# Altium PCB PCB_Keypad_Rev3_2025-01-16.pcbdoc
Units mm, origin at the board's own origin, x right, y up, seen from the top; angles counter-clockwise.
Board outline 82.58 x 103.2 mm, 2 copper layers (Top Layer, Bottom Layer); 55 components, 70 nets, 237 pads, 37 vias.
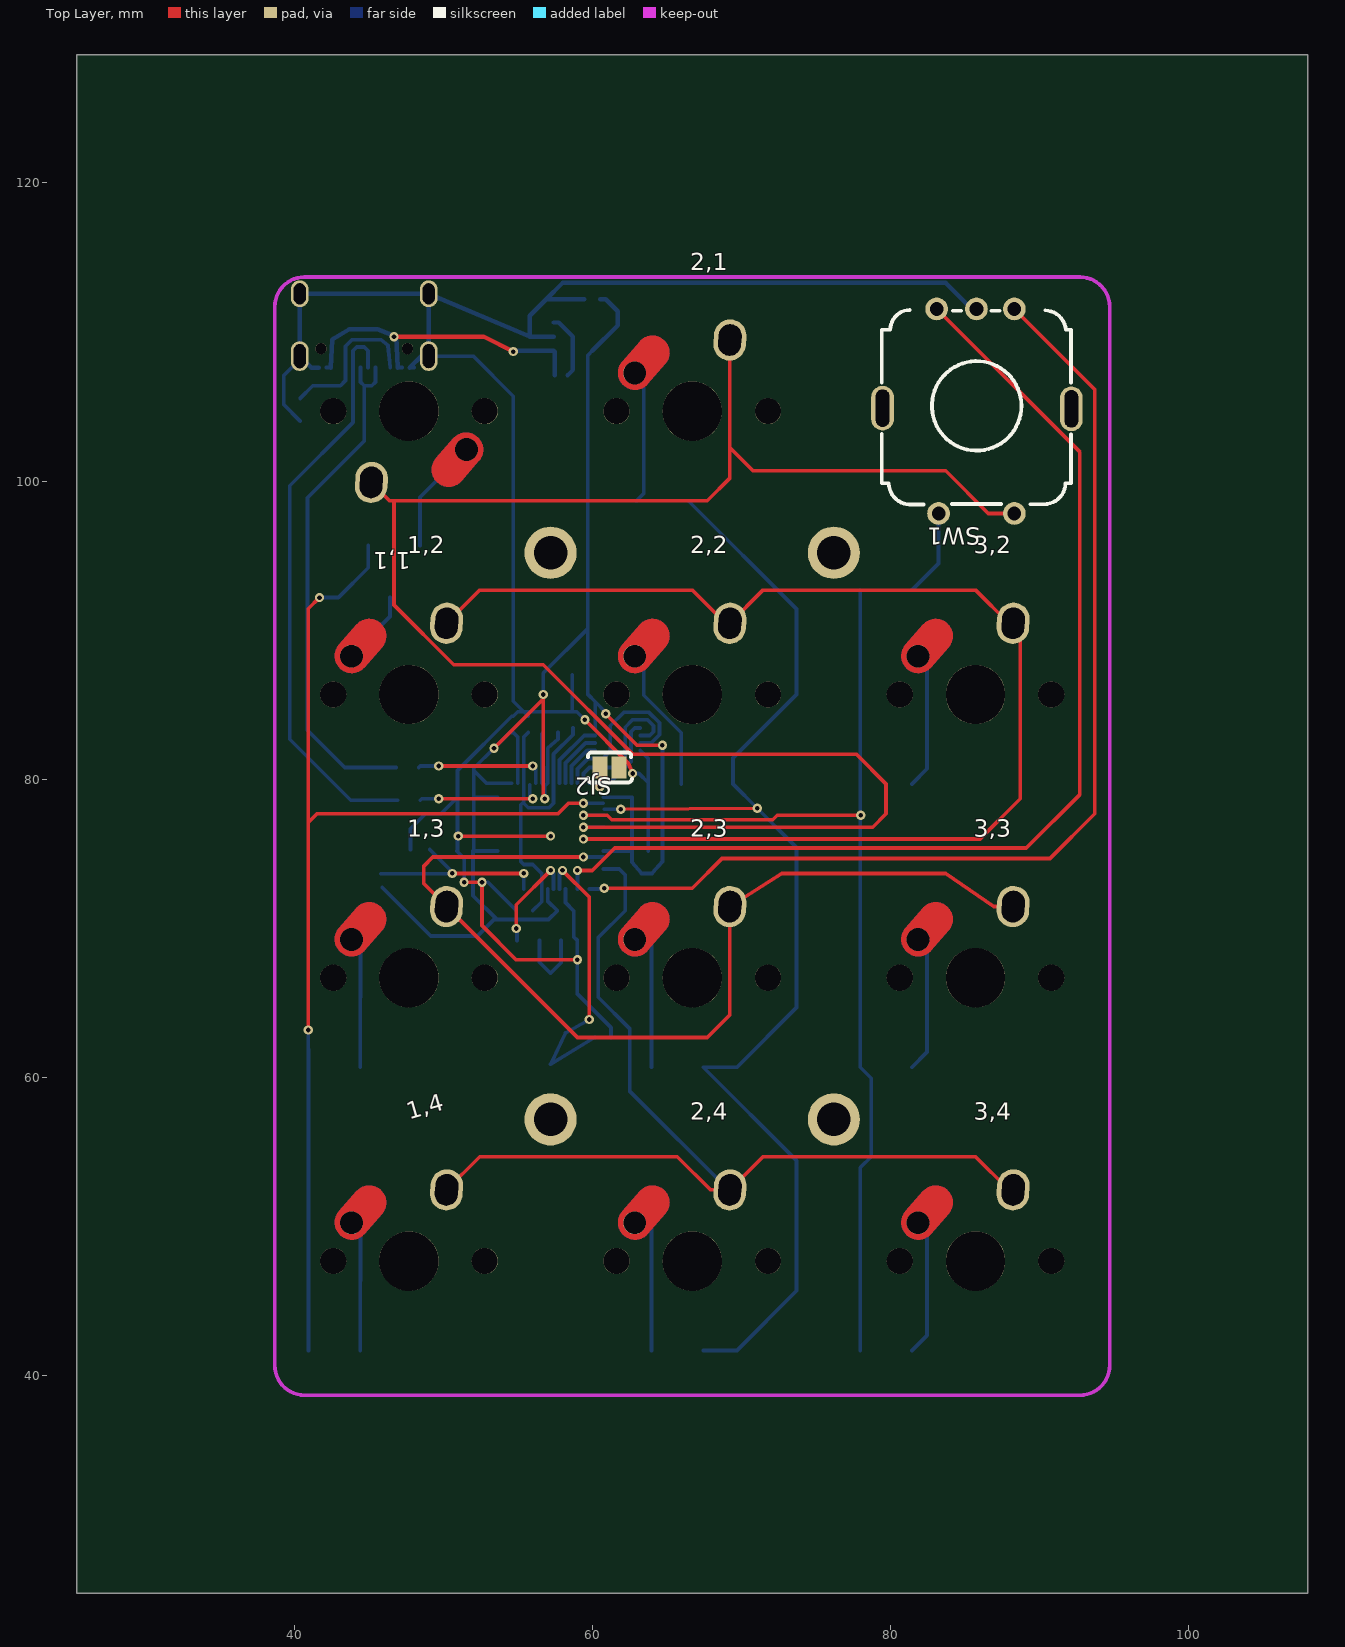
[diagram p0: Top Layer view]
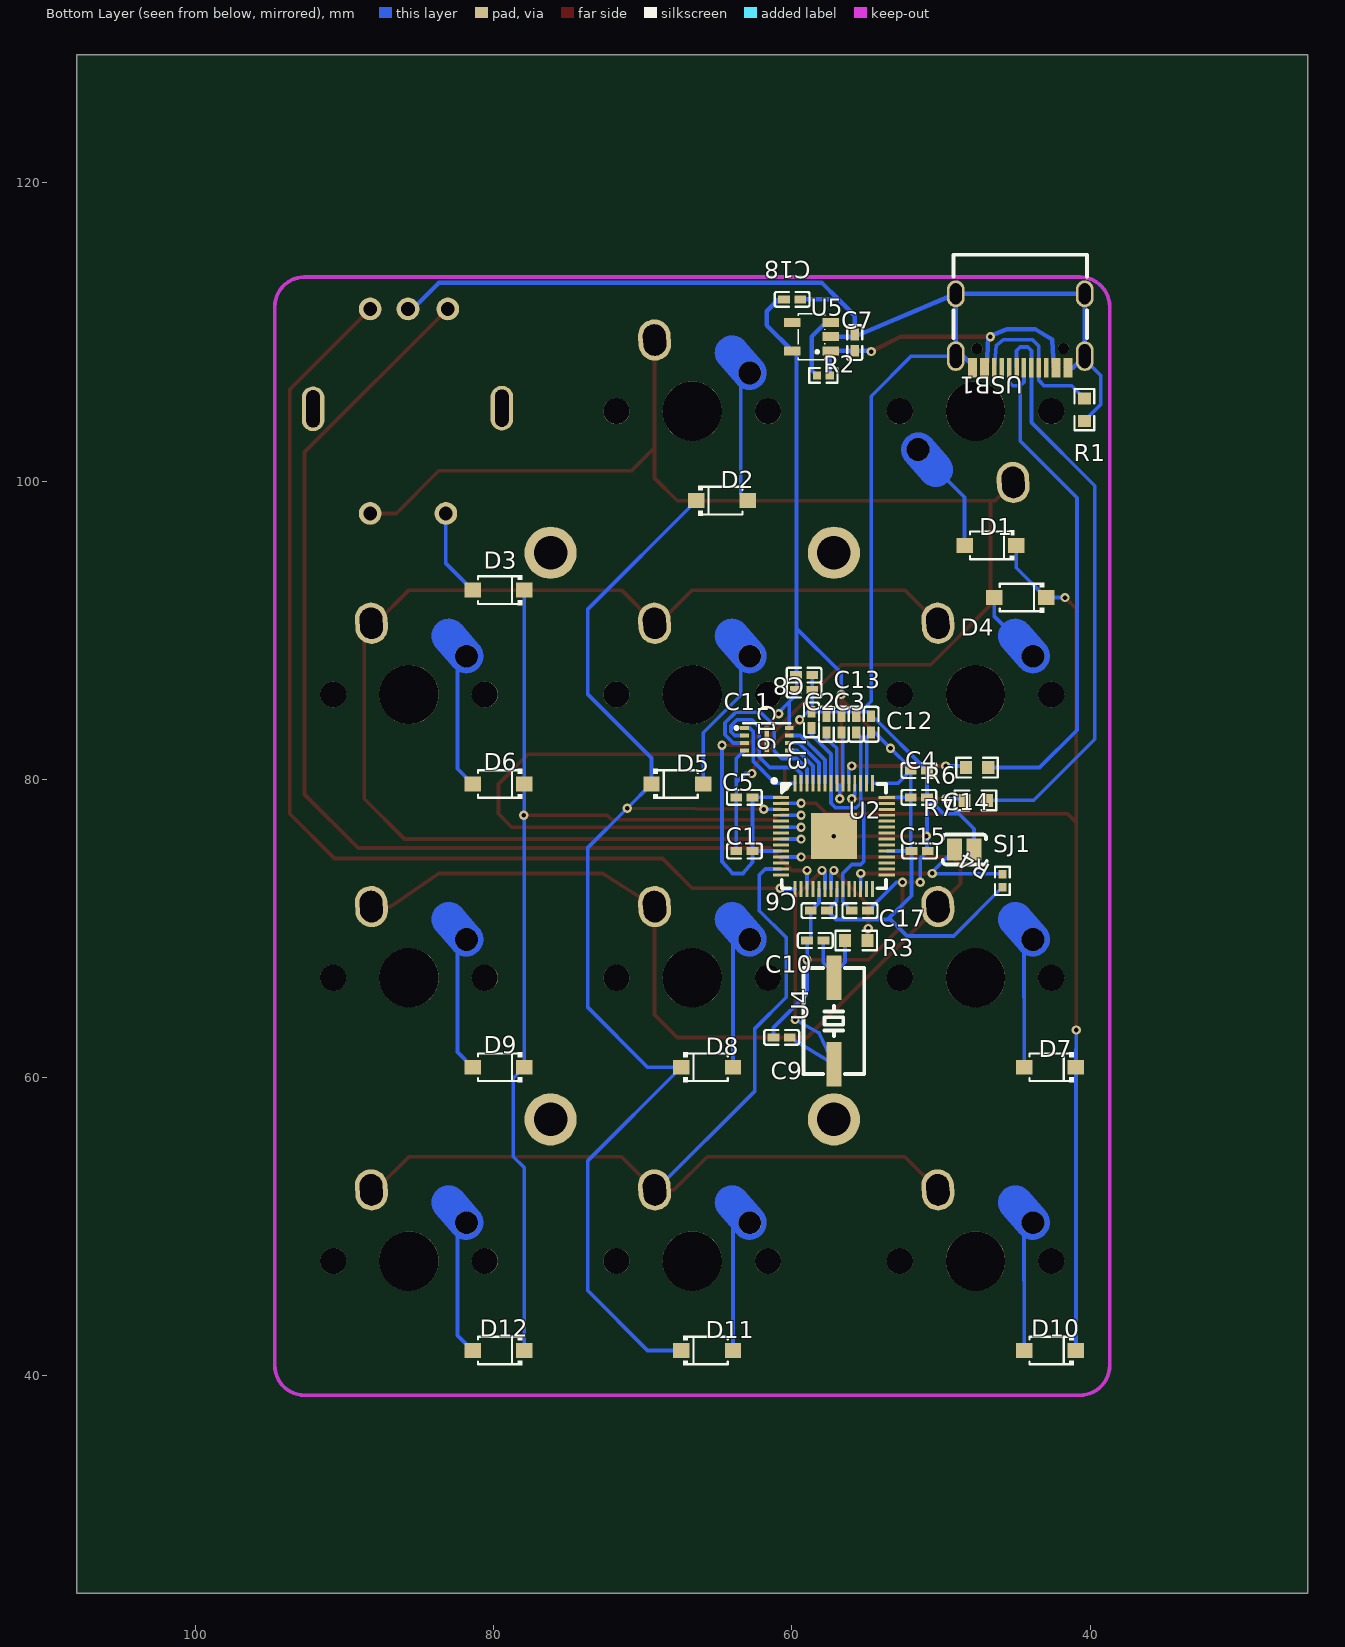
[diagram p1: Bottom Layer view, seen from below]

## Layer stack, top to bottom
Top Layer: signal copper (thickness not stored)
Dielectric: dielectric 0.32, FR-4, Dk 4.8
Bottom Layer: signal copper (thickness not stored)

## Board outline
107.977,25.4 25.4,25.4 25.4,128.603 107.977,128.603

## Components (designator, comment, footprint, x,y, rotation, side; value= is the part's Value field where it differs from the comment)
1,1 "MX_ALPS-1U-NOLED" MX_ALPS-1U-NOLED 47.688,104.688 r180 top
1,2 "MX_ALPS-1U-NOLED" MX_ALPS-1U-NOLED 47.688,85.688 r0 top
1,3 "MX_ALPS-1U-NOLED" MX_ALPS-1U-NOLED 47.688,66.688 r0 top
1,4 "MX_ALPS-1U-NOLED" MX_ALPS-1U-NOLED 47.688,47.688 r0 top
2,1 "MX_ALPS-1U-NOLED" MX_ALPS-1U-NOLED 66.688,104.688 r0 top
2,2 "MX_ALPS-1U-NOLED" MX_ALPS-1U-NOLED 66.688,85.688 r0 top
2,3 "MX_ALPS-1U-NOLED" MX_ALPS-1U-NOLED 66.688,66.688 r0 top
2,4 "MX_ALPS-1U-NOLED" MX_ALPS-1U-NOLED 66.688,47.688 r0 top
3,2 "MX_ALPS-1U-NOLED" MX_ALPS-1U-NOLED 85.688,85.688 r0 top
3,3 "MX_ALPS-1U-NOLED" MX_ALPS-1U-NOLED 85.688,66.688 r0 top
3,4 "MX_ALPS-1U-NOLED" MX_ALPS-1U-NOLED 85.688,47.688 r0 top
C1 "100nF" C0402 63.188,75.188 r0 bottom
C2 "100nF" C0402 57.688,83.688 r90 bottom
C3 "100nF" C0402 56.688,83.688 r90 bottom
C4 "100nF" C0402 51.488,80.588 r180 bottom
C5 "100nF" C0402 63.188,78.788 r0 bottom
C6 "100nF" C0402 58.188,71.188 r0 bottom
C7 "1uF" C0402 55.788,109.288 r90 bottom
C8 "100nF" C0402 59.188,86.988 r180 bottom
C9 "22pF" C0402 60.688,62.688 r0 bottom
C10 "22pF" C0402 58.438,69.188 r0 bottom
C11 "2.2uF" C0402 59.188,85.988 r0 bottom
C12 "1uF" C0402 54.688,83.688 r270 bottom
C13 "1uF" C0402 55.688,83.688 r270 bottom
C14 "100nF" C0402 51.488,78.788 r180 bottom
C15 "100nF" C0402 51.439,75.188 r180 bottom
C16 "100nF" C0402 58.688,83.988 r90 bottom
C17 "100nF" C0402 55.438,71.188 r180 bottom
C18 "1uF" C0402 59.988,112.188 r180 bottom
D1 "1N4148W_C81598" SOD-123F_L2.7-W1.6-LS3.8-RD 46.689,95.688 r180 bottom
D2 "1N4148W_C81598" SOD-123F_L2.7-W1.6-LS3.8-RD 64.688,98.688 r0 bottom
D3 "1N4148W_C81598" SOD-123F_L2.7-W1.6-LS3.8-RD 79.688,92.688 r180 bottom
D4 "1N4148W_C81598" SOD-123F_L2.7-W1.6-LS3.8-RD 44.689,92.188 r180 bottom
D5 "1N4148W_C81598" SOD-123F_L2.7-W1.6-LS3.8-RD 67.688,79.688 r0 bottom
D6 "1N4148W_C81598" SOD-123F_L2.7-W1.6-LS3.8-RD 79.688,79.688 r180 bottom
D7 "1N4148W_C81598" SOD-123F_L2.7-W1.6-LS3.8-RD 42.689,60.688 r180 bottom
D8 "1N4148W_C81598" SOD-123F_L2.7-W1.6-LS3.8-RD 65.688,60.688 r0 bottom
D9 "1N4148W_C81598" SOD-123F_L2.7-W1.6-LS3.8-RD 79.688,60.688 r180 bottom
D10 "1N4148W_C81598" SOD-123F_L2.7-W1.6-LS3.8-RD 42.689,41.689 r180 bottom
D11 "1N4148W_C81598" SOD-123F_L2.7-W1.6-LS3.8-RD 65.688,41.689 r0 bottom
D12 "1N4148W_C81598" SOD-123F_L2.7-W1.6-LS3.8-RD 79.688,41.689 r180 bottom
R1 "5.1k" R0603 40.389,104.788 r90 bottom
R2 "10kΩ" R0402 57.888,107.088 r0 bottom
R3 "1kΩ" R0603 55.688,69.188 r180 bottom
R4 "10kΩ" R0402 45.889,73.188 r270 bottom
R6 "27Ω" R0603 47.589,80.788 r0 bottom
R7 "27Ω" R0603 47.688,78.588 r180 bottom
SJ1 "JUMPER-PAD-2" PAD-JUMPER-2#1 47.788,75.288 r180 bottom
SJ2 "JUMPER-PAD-2" PAD-JUMPER-2#2 61.788,80.788 r180 top
SW1 "Rotary Encoder" ROTARYENCODER 85.688,104.688 r180 top
U2 "RP2040" LQFN-56_L7.0-W7.0-P0.4-EP 57.188,76.188 r0 bottom
U3 "W25Q16JVUXIQ" USON-8_L3.0-W2.0-P0.50-BL-EP 61.688,82.688 r90 bottom
U4 "12MHz" HC-49S_L7.0-W4.0 57.188,63.788 r270 bottom
U5 "TPTLV70233DBVR" SOT-23-5_L3.0-W1.7-P0.95-LS2.8-BR 58.688,109.688 r0 bottom
USB1 "USB-TYPE-C-018" USB-C_SMD-TYPE-C-31-M-12 44.689,110.088 r180 bottom

## Footprints (in the part's own frame and the unit in brackets; to place one, negate y for a bottom-side part, rotate by r counter-clockwise, add the part's x,y. Pads: shape width x height; smd on the part's side, far side on the other; paste and mask are expansions set on the pad)
C0402 [mm]
  rect 0.79x0.54 smd paste-100 mask+0.051: 1(0.545,0) 2(-0.545,0)
  silkscreen extent -1.17,-0.5 1.17,0.5
HC-49S_L7.0-W4.0 [mm]
  rect 3x1 smd paste+0 mask+0.051: 1(2.9,0) 2(-2.9,0)
  silkscreen extent -3.56,-2.03 3.56,2.03
LQFN-56_L7.0-W7.0-P0.4-EP [mm]
  rect 1.1x0.2 smd paste-100 mask+0.05: 1(3.55,-2.6) 2(3.55,-2.2) 3(3.55,-1.8) 4(3.55,-1.4) 5(3.55,-1) 6(3.55,-0.6) 7(3.55,-0.2) 8(3.55,0.2) 9(3.55,0.6) 10(3.55,1) 11(3.55,1.4) 12(3.55,1.8) 13(3.55,2.2) 14(3.55,2.6) 29(-3.55,2.6) 30(-3.55,2.2) 31(-3.55,1.8) 32(-3.55,1.4) 33(-3.55,1) 34(-3.55,0.6) 35(-3.55,0.2) 36(-3.55,-0.2) 37(-3.55,-0.6) 38(-3.55,-1) 39(-3.55,-1.4) 40(-3.55,-1.8) 41(-3.55,-2.2) 42(-3.55,-2.6)
  rect 0.2x1.1 smd paste-100 mask+0.05: 15(2.6,3.55) 16(2.2,3.55) 17(1.8,3.55) 18(1.4,3.55) 19(1,3.55) 20(0.6,3.55) 21(0.2,3.55) 22(-0.2,3.55) 23(-0.6,3.55) 24(-1,3.55) 25(-1.4,3.55) 26(-1.8,3.55) 27(-2.2,3.55) 28(-2.6,3.55) 43(-2.6,-3.55) 44(-2.2,-3.55) 45(-1.8,-3.55) 46(-1.4,-3.55) 47(-1,-3.55) 48(-0.6,-3.55) 49(-0.2,-3.55) 50(0.2,-3.55) 51(0.6,-3.55) 52(1,-3.55) 53(1.4,-3.55) 54(1.8,-3.55) 55(2.2,-3.55) 56(2.6,-3.55)
  rect 3.1x3.1 smd paste-100 mask+0.05: 57(0,0)
  silkscreen extent -3.5,-3.83 4.13,3.5
MX_ALPS-1U-NOLED [mil]
  round 60 hole 60 paste+0: 1(-152,101)
  oval 108.9x86 hole 60 slot 82.9 at 86 deg rot 86 paste+0 mask+4: 2(99.4,188)
  round 68.9 hole 68.9 unplated paste+0: ""(-200,0) ""(200,0)
  round 157 hole 157 unplated paste+0: ""(0,0)
  Top Layer region: -150.63,56.59 -152.87,56.62 -155.11,56.78 -157.34,57.04 -159.55,57.41 -161.74,57.89 -163.9,58.49 -166.04,59.18 -168.13,59.99 -170.18,60.9 -172.19,61.91 -174.14,63.01 -176.03,64.22 -177.86,65.51 -179.63,66.9 -181.32,68.37 -182.94,69.92 -184.48,71.56 -185.93,73.27 -187.3,75.04 -188.58,76.89 -189.76,78.79 -190.85,80.76 -191.84,82.77 -192.73,84.83 -193.51,86.93 -194.19,89.07 -194.76,91.24 -195.22,93.44 -195.57,95.66 -195.81,97.89 -195.94,100.13 -195.96,102.37 -195.86,104.61 -195.65,106.85 -195.34,109.07 -194.91,111.27 -194.37,113.45 -193.73,115.6 -192.97,117.71 -192.12,119.79 -191.16,121.81 -190.1,123.79 -188.95,125.72 -187.7,127.58 -186.35,129.38 -184.93,131.11 -139,183.94 -137.49,185.59 -135.89,187.17 -134.22,188.67 -132.48,190.08 -130.67,191.41 -128.79,192.64 -126.86,193.77 -124.87,194.81 -122.83,195.75 -120.75,196.59 -118.62,197.32 -116.47,197.94 -114.29,198.45 -112.08,198.86 -109.86,199.16 -107.62,199.34 -105.38,199.41 -103.13,199.38 -100.89,199.22 -98.66,198.96 -96.45,198.59 -94.26,198.11 -92.1,197.51 -89.96,196.82 -87.87,196.01 -85.82,195.1 -83.81,194.1 -81.86,192.99 -79.97,191.78 -78.14,190.49 -76.37,189.1 -74.68,187.63 -73.06,186.08 -71.52,184.44 -70.07,182.74 -68.7,180.96 -67.42,179.11 -66.24,177.21 -65.15,175.24 -64.16,173.23 -63.27,171.17 -62.49,169.07 -61.81,166.93 -61.24,164.76 -60.78,162.56 -60.43,160.34 -60.19,158.11 -60.06,155.87 -60.05,153.63 -60.14,151.39 -60.35,149.15 -60.66,146.93 -61.09,144.73 -61.63,142.55 -62.28,140.4 -63.03,138.29 -63.88,136.22 -64.84,134.19 -65.9,132.21 -67.06,130.28 -68.31,128.42 -69.65,126.62 -71.08,124.89 -117,72.06 -118.52,70.41 -120.11,68.83 -121.78,67.33 -123.52,65.92 -125.34,64.6 -127.21,63.36 -129.15,62.23 -131.13,61.19 -133.17,60.25 -135.26,59.41 -137.38,58.68 -139.53,58.06 -141.72,57.55 -143.92,57.14 -146.15,56.84 -148.38,56.66
  Bottom Layer region: -150.63,56.59 -152.87,56.62 -155.11,56.78 -157.34,57.04 -159.55,57.41 -161.74,57.89 -163.9,58.49 -166.04,59.18 -168.13,59.99 -170.18,60.9 -172.19,61.91 -174.14,63.01 -176.03,64.22 -177.86,65.51 -179.63,66.9 -181.32,68.37 -182.94,69.92 -184.48,71.56 -185.93,73.27 -187.3,75.04 -188.58,76.89 -189.76,78.79 -190.85,80.76 -191.84,82.77 -192.73,84.83 -193.51,86.93 -194.19,89.07 -194.76,91.24 -195.22,93.44 -195.57,95.66 -195.81,97.89 -195.94,100.13 -195.96,102.37 -195.86,104.61 -195.65,106.85 -195.34,109.07 -194.91,111.27 -194.37,113.45 -193.73,115.6 -192.97,117.71 -192.12,119.79 -191.16,121.81 -190.1,123.79 -188.95,125.72 -187.7,127.58 -186.35,129.38 -184.93,131.11 -139,183.94 -137.49,185.59 -135.89,187.17 -134.22,188.67 -132.48,190.08 -130.67,191.41 -128.79,192.64 -126.86,193.77 -124.87,194.81 -122.83,195.75 -120.75,196.59 -118.62,197.32 -116.47,197.94 -114.29,198.45 -112.08,198.86 -109.86,199.16 -107.62,199.34 -105.38,199.41 -103.13,199.38 -100.89,199.22 -98.66,198.96 -96.45,198.59 -94.26,198.11 -92.1,197.51 -89.96,196.82 -87.87,196.01 -85.82,195.1 -83.81,194.1 -81.86,192.99 -79.97,191.78 -78.14,190.49 -76.37,189.1 -74.68,187.63 -73.06,186.08 -71.52,184.44 -70.07,182.74 -68.7,180.96 -67.42,179.11 -66.24,177.21 -65.15,175.24 -64.16,173.23 -63.27,171.17 -62.49,169.07 -61.81,166.93 -61.24,164.76 -60.78,162.56 -60.43,160.34 -60.19,158.11 -60.06,155.87 -60.05,153.63 -60.14,151.39 -60.35,149.15 -60.66,146.93 -61.09,144.73 -61.63,142.55 -62.28,140.4 -63.03,138.29 -63.88,136.22 -64.84,134.19 -65.9,132.21 -67.06,130.28 -68.31,128.42 -69.65,126.62 -71.08,124.89 -117,72.06 -118.52,70.41 -120.11,68.83 -121.78,67.33 -123.52,65.92 -125.34,64.6 -127.21,63.36 -129.15,62.23 -131.13,61.19 -133.17,60.25 -135.26,59.41 -137.38,58.68 -139.53,58.06 -141.72,57.55 -143.92,57.14 -146.15,56.84 -148.38,56.66
  Multi-Layer region: -150.63,56.59 -152.87,56.62 -155.11,56.78 -157.34,57.04 -159.55,57.41 -161.74,57.89 -163.9,58.49 -166.04,59.18 -168.13,59.99 -170.18,60.9 -172.19,61.91 -174.14,63.01 -176.03,64.22 -177.86,65.51 -179.63,66.9 -181.32,68.37 -182.94,69.92 -184.48,71.56 -185.93,73.27 -187.3,75.04 -188.58,76.89 -189.76,78.79 -190.85,80.76 -191.84,82.77 -192.73,84.83 -193.51,86.93 -194.19,89.07 -194.76,91.24 -195.22,93.44 -195.57,95.66 -195.81,97.89 -195.94,100.13 -195.96,102.37 -195.86,104.61 -195.65,106.85 -195.34,109.07 -194.91,111.27 -194.37,113.45 -193.73,115.6 -192.97,117.71 -192.12,119.79 -191.16,121.81 -190.1,123.79 -188.95,125.72 -187.7,127.58 -186.35,129.38 -184.93,131.11 -139,183.94 -137.49,185.59 -135.89,187.17 -134.22,188.67 -132.48,190.08 -130.67,191.41 -128.79,192.64 -126.86,193.77 -124.87,194.81 -122.83,195.75 -120.75,196.59 -118.62,197.32 -116.47,197.94 -114.29,198.45 -112.08,198.86 -109.86,199.16 -107.62,199.34 -105.38,199.41 -103.13,199.38 -100.89,199.22 -98.66,198.96 -96.45,198.59 -94.26,198.11 -92.1,197.51 -89.96,196.82 -87.87,196.01 -85.82,195.1 -83.81,194.1 -81.86,192.99 -79.97,191.78 -78.14,190.49 -76.37,189.1 -74.68,187.63 -73.06,186.08 -71.52,184.44 -70.07,182.74 -68.7,180.96 -67.42,179.11 -66.24,177.21 -65.15,175.24 -64.16,173.23 -63.27,171.17 -62.49,169.07 -61.81,166.93 -61.24,164.76 -60.78,162.56 -60.43,160.34 -60.19,158.11 -60.06,155.87 -60.05,153.63 -60.14,151.39 -60.35,149.15 -60.66,146.93 -61.09,144.73 -61.63,142.55 -62.28,140.4 -63.03,138.29 -63.88,136.22 -64.84,134.19 -65.9,132.21 -67.06,130.28 -68.31,128.42 -69.65,126.62 -71.08,124.89 -117,72.06 -118.52,70.41 -120.11,68.83 -121.78,67.33 -123.52,65.92 -125.34,64.6 -127.21,63.36 -129.15,62.23 -131.13,61.19 -133.17,60.25 -135.26,59.41 -137.38,58.68 -139.53,58.06 -141.72,57.55 -143.92,57.14 -146.15,56.84 -148.38,56.66
PAD-JUMPER-2#1 [mm]
  rect 1x1.5 smd paste+0 mask+0.102: 1(0,0) 2(-1.3,0)
  silkscreen extent -2.1,-1 0.85,1
PAD-JUMPER-2#2 [mm]
  rect 1x1.5 smd paste+0 mask+0.102: 1(0,0) 2(1.3,0)
  silkscreen extent -0.85,-1 2.1,1
R0402 [mm]
  rect 0.566x0.54 smd paste-100 mask+0.051: 1(0.433,0) 2(-0.433,0)
  silkscreen extent -0.94,-0.5 0.94,0.5
R0603 [mm]
  rect 0.806x0.864 smd paste-100 mask+0.051: 1(0.753,0) 2(-0.753,0)
  silkscreen extent -1.39,-0.66 1.39,0.66
ROTARYENCODER [mil]
  round 60 hole 36 paste+0 mask+2: 1(-102.51,-269.99) 2(-2.51,-270) 3(102.49,-270) 4(-102.51,270) 5(97.49,270)
  oval 60x118.11 hole 36 slot 98.43 at 90 deg paste+0: ""(-253.11,-6.33) ""(245.34,-8)
  silkscreen extent -253,-267 248,247
SOD-123F_L2.7-W1.6-LS3.8-RD [mm]
  rect 1.1x1 smd paste+0 mask+0.051: 1(1.735,0) 2(-1.735,0)
  silkscreen extent -1.38,-1 1.6,1
SOT-23-5_L3.0-W1.7-P0.95-LS2.8-BR [mm]
  rect 1.1x0.6 smd paste+0 mask+0.051: 1(-1.3,0.95) 2(-1.3,0) 3(-1.3,-0.95) 4(1.3,-0.95) 5(1.3,0.95)
  silkscreen extent -0.9,-1.55 0.9,1.55
USB-C_SMD-TYPE-C-31-M-12 [mm]
  oval 1.2x2 hole 0.8 slot 1.6 at 90 deg paste+0 mask+0.051: 0(4.325,-1.706) 1(-4.325,-1.706)
  oval 1.2x1.8 hole 0.8 slot 1.4 at 90 deg paste+0 mask+0.051: 2(-4.325,2.474) 3(4.325,2.474)
  rect 0.3x1.3 smd paste-100 mask+0.051: A1(3.35,-2.474) A4(2.55,-2.474) A5(1.25,-2.474) A6(0.25,-2.474) A7(-0.25,-2.474) A8(-1.25,-2.474) A9(-2.55,-2.474) A12(-3.35,-2.474) B1(-3.05,-2.474) B4(-2.25,-2.474) B5(-1.75,-2.474) B6(-0.75,-2.474) B7(0.75,-2.474) B8(1.75,-2.474) B9(2.25,-2.474) B12(3.05,-2.474)
  round 0.75 hole 0.75 unplated paste+0: ""(-2.9,-1.206) ""(2.9,-1.206)
  silkscreen extent -4.47,-0.49 4.47,5.09
USON-8_L3.0-W2.0-P0.50-BL-EP [mm]
  rect 0.28x0.6 smd paste+0 mask+0.051: 1(0.75,1.507) 2(0.25,1.507) 3(-0.25,1.507) 4(-0.75,1.507) 5(-0.75,-1.508) 6(-0.25,-1.507) 7(0.25,-1.508) 8(0.75,-1.507)
  rect 1.7x0.3 smd paste+0 mask+0.051: 9(0,0)
  silkscreen extent -1.08,-1.58 1.08,2.13

## Free pads (board coordinates)
  round 3.5 hole 2.25 paste+0 mask+0.051: 1(57.188,57.189) 1(57.188,95.189) 1(76.188,57.189) 1(76.188,95.189)

## Via types
v1: diameter 0.62, hole 0.31, Top Layer to Bottom Layer, tented both sides, 37 vias

## Nets (pads, with @x,y where several pads share a name; then routed paths per layer and width w, separated by ;. In a path a pad name is that pad's centre, name@x,y a point inside that pad or via, vN(x,y) a via of type N, cw(c..) or ccw(c..) an arc to the next point about the centre after c; other vN are vias at no path point)
1,1_1: 1,1.1 D1.2 | length 6.8
  Bottom Layer w0.25: D1.2 48.423,98.921 50.94,101.437
1,2_1: 1,2.1 D4.2 | length 4.1
  Bottom Layer w0.25: 44.437,88.94 46.423,90.926 D4.2
1,3_1: 1,3.1 D7.2 | length 9.3
  Bottom Layer w0.25: D7.2@44.422,60.688 44.437,69.939
1,4_1: 1,4.1 D10.2 | length 9.3
  Bottom Layer w0.25: D10.2@44.422,41.689 44.437,50.939
1.1V: C13.1 C16.2 C17.2 U2.23 U2.45 U2.50 | length 21.3
  Bottom Layer w0.25: 55.389,78.488 55.188,78.288 55.188,74.488 55.388,74.288 55.988,74.288 56.589,73.688 U2.23 56.589,71.793 C17.2 ; U2.45 55.389,82.843 C13.1 ; U2.45 55.387,78.389 55.689,78.09 57.088,78.088 57.388,78.388 57.389,79.088 U2.50 57.389,80.858 57.389,81.689 58.689,82.989 C16.2
2,1_1: 2,1.1 D2.2 | length 9.5
  Bottom Layer w0.25: D2.2 63.437,99.172 63.437,107.94
2,2_1: 2,2.1 D5.2 | length 10.3
  Bottom Layer w0.25: 63.437,88.94 63.437,85.64 65.954,83.123 D5.2
2,3_1: 2,3.1 D8.2 | length 9.5
  Bottom Layer w0.25: 63.437,69.94 63.953,69.424 D8.2@63.953,60.688
2,4_1: 2,4.1 D11.2 | length 9.5
  Bottom Layer w0.25: 63.437,50.94 63.953,50.424 D11.2@63.953,41.689
3,2_1: 3,2.1 D6.2 | length 9.7
  Bottom Layer w0.25: D6.2 82.437,80.702 82.437,88.94
3,3_1: 3,3.1 D9.2 | length 9.7
  Bottom Layer w0.25: D9.2 82.437,61.702 82.437,69.94
3,4_1: 3,4.1 D12.2 | length 9.7
  Bottom Layer w0.25: D12.2 82.437,42.702 82.437,50.94
C10_2: C10.2 R3.2 U4.2 | length 5
  Bottom Layer w0.25: R3.2 56.442,67.735 57.188,66.988 57.893,67.693 C10.2
CC: R1.1 USB1.A5 USB1.B5 | length 10.5
  Bottom Layer w0.25: R1.1 41.235,106.388 43.089,106.388 43.439,106.738 USB1.A5 43.439,109.038 43.889,109.488 45.789,109.488 46.289,109.088 USB1.B5
COL1: D1.1 D4.1 D7.1 D10.1 U2.2 | length 76.7
  Top Layer w0.25: v1(40.938,63.188) 40.939,91.438 v1(41.689,92.188) ; 40.939,77.108 41.518,77.688 57.688,77.688 58.388,78.388 v1(59.389,78.388)
  Bottom Layer w0.25: v1(40.938,63.188) D7.1 ; D10.1 D7.1 ; v1(41.689,92.188) D4.1 44.953,94.188 D1.1 ; v1(59.389,78.388) U2.2@60.697,78.388
COL2: D2.1 D5.1 D8.1 D11.1 U2.3 | length 84.3
  Top Layer w0.25: v1(61.888,77.988) v1(71.054,78.058)
  Bottom Layer w0.25: U2.3@60.78,77.988 v1@61.887,77.988 ; D2.1 73.688,91.423 73.688,85.688 69.423,81.423 D5.1 71.054,78.058 73.688,75.423 73.688,64.688 69.688,60.688 D8.1 73.688,54.424 73.688,45.689 69.688,41.689 D11.1
COL3: D3.1 D6.1 D9.1 D12.1 U2.4 | length 71.8
  Top Layer w0.25: v1(59.389,77.588) 60.988,77.588 61.288,77.288 72.088,77.288 72.388,77.588 v1(77.988,77.588)
  Bottom Layer w0.25: v1(59.389,77.588) U2.4 ; D12.1 77.953,53.953 78.688,54.688 78.688,59.953 D9.1 77.953,77.512 D6.1 D3.1
D3_2: D3.2 SW1.5 | length 5.9
  Bottom Layer w0.25: D3.2 83.212,94.477 SW1.5
DD: R7.1 USB1.A7 USB1.B7 | length 39.1
  Bottom Layer w0.25: USB1.B7 43.938,108.738 44.189,108.988 44.689,108.988 44.938,108.738 USB1.A7 ; USB1.B7 43.939,103.939 39.689,99.688 39.689,82.688 43.788,78.588 R7.1
DU: R6.2 USB1.A6 USB1.B6 | length 34.8
  Bottom Layer w0.25: USB1.A6 44.439,106.638 44.689,106.388 ; USB1.B6 45.439,106.638 45.189,106.388 44.689,106.388 ; R6.2@46.835,80.79 43.388,80.79 40.889,83.289 40.889,98.887 44.689,102.689 44.689,106.388
GND: C1.1 C2.1 C3.1 C4.1 C5.1 C6.1 C7.1 C8.1 C9.1 C10.1 C11.2 C12.2 C13.2 C14.1 C15.1 C16.1 C17.1 C18.1 R1.2 SJ1.1 SJ2.1 SW1.2 U2.19 U2.57 U3.4 U5.2 USB1.0 USB1.1 USB1.2 USB1.3 USB1.A1 USB1.A12 USB1.B1 USB1.B12 | length 170.2
  Top Layer w0.25: v1(50.988,76.188) v1(57.189,76.188) ; v1(51.389,73.088) v1(52.588,73.088) 52.588,70.188 54.888,67.888 v1(58.988,67.888) ; v1(59.489,83.988) 62.387,81.089 v1(62.688,80.388)
  Bottom Layer w0.25: USB1.0 40.363,108.163 39.289,107.088 39.289,105.135 R1.2 ; USB1.A1 USB1.B12 ; USB1.B1 USB1.A12 ; SJ1.1 47.789,76.689 48.788,77.688 49.843,77.688 C14.1 ; USB1.1 51.994,108.382 54.689,105.689 54.689,85.233 C13.2 ; C15.1 51.388,74.693 v1(51.389,73.088) ; C15.1 50.943,75.238 C14.1 ; v1(52.588,73.088) 52.993,73.088 C17.1 ; U2.19 58.188,71.734 C6.1 58.733,69.439 C10.1 58.984,65.593 61.234,63.343 C9.1 ; C8.1 58.643,84.579 C16.1 ; v1(59.489,83.988) 58.943,84.533 C16.1 ; v1(62.688,80.388) 63.109,80.388 63.733,79.764 ; U3.4 63.733,81.401 C5.1 C1.1 ; C14.1 C4.1 54.588,84.234 C12.2 54.988,84.533 C16.1
  Bottom Layer w0.3: USB1.B12 41.132,107.614 USB1.0 USB1.3 USB1.2 ; USB1.B1 48.507,108.383 USB1.1 USB1.2 ; C7.1 55.788,111.088 56.888,112.188 ; U5.2 55.788,109.688 USB1.2 ; C18.1 56.888,112.188 ; SW1.2 85.43,111.546 83.688,113.288 57.988,113.288 56.888,112.188
QSPI_SCLK: U2.52 U3.6 | length 3.9
  Bottom Layer w0.25: U2.52 58.189,81.089 59.539,82.438 U3.6
QSPI_SD0: U2.53 U3.5 | length 3.2
  Bottom Layer w0.25: U2.53 58.588,80.888 59.638,81.938 U3.5
QSPI_SD1: U2.55 U3.2 | length 9.6
  Bottom Layer w0.25: U2.55 59.389,80.388 59.788,80.788 61.488,80.788 62.188,81.488 62.188,83.488 62.688,83.988 63.688,83.988 64.088,83.588 64.088,83.188 63.838,82.938 U3.2
QSPI_SD2: U2.54 U3.3 | length 11.6
  Bottom Layer w0.25: U2.54 58.989,80.689 59.688,81.388 60.688,81.388 61.188,81.888 61.188,83.588 62.088,84.488 63.788,84.488 64.488,83.788 64.488,82.988 63.939,82.438 U3.3
QSPI_SD3: U2.51 U3.7 | length 4.6
  Bottom Layer w0.25: U2.51 57.788,81.287 59.439,82.938 U3.7
QSPI_SS: SJ2.2 U2.56 U3.1 | length 8.2
  Top Layer w0.25: v1(60.489,79.489) SJ2.2
  Bottom Layer w0.25: v1(60.489,79.489) 60.238,79.738 U2.56 61.139,79.738 62.588,81.188 62.588,83.188 62.839,83.438 U3.1
R2_1: R2.1 U5.3 | length 4.4
  Bottom Layer w0.3: U5.3 57.739,110.638 58.688,109.688 58.688,107.456 R2.1
ROT1: SW1.1 U2.15 | length 72.1
  Top Layer w0.25: v1(60.789,72.688) 66.688,72.688 68.688,74.688 90.688,74.688 93.688,77.688 93.688,106.15 SW1.1
  Bottom Layer w0.25: U2.15 60.738,72.638 v1(60.789,72.688)
ROT2: SW1.3 U2.17 | length 73.6
  Top Layer w0.25: v1(58.988,73.888) 59.988,73.888 61.488,75.388 89.088,75.388 92.688,78.988 92.688,101.943 SW1.3
  Bottom Layer w0.25: U2.17 v1(58.988,73.888)
ROW1: 1,1.2 2,1.2 SW1.4 U2.6 | length 124.3
  Top Layer w0.25: 45.164,99.913 46.389,98.688 67.688,98.688 69.213,100.213 69.213,109.464 ; 46.689,98.688 46.689,91.688 50.688,87.688 56.688,87.688 62.688,81.688 77.688,81.688 79.688,79.688 79.688,77.688 78.788,76.788 v1(59.389,76.789) ; 69.213,102.239 70.764,100.688 83.688,100.688 86.546,97.83 SW1.4
  Bottom Layer w0.25: v1(59.389,76.789) U2.6
ROW2: 1,2.2 2,2.2 3,2.2 U2.8 | length 85.4
  Top Layer w0.25: 50.213,90.464 52.438,92.688 66.688,92.688 68.913,90.464 69.213,90.464 71.438,92.688 85.688,92.688 87.913,90.464 88.213,90.464 88.688,89.988 88.688,78.688 85.988,75.988 v1(59.389,75.988)
  Bottom Layer w0.25: v1(59.389,75.988) U2.8
ROW3: 1,3.2 2,3.2 3,3.2 U2.11 | length 66.5
  Top Layer w0.25: 49.289,74.788 48.689,74.188 48.689,72.989 50.213,71.463 ; 49.289,74.788 v1(59.389,74.789) ; 50.213,71.464 58.988,62.688 67.688,62.688 69.213,64.213 69.213,71.464 72.688,73.688 83.688,73.688 86.913,71.464 88.213,71.464
  Bottom Layer w0.25: v1(59.389,74.789) U2.11@60.696,74.788
ROW4: 1,4.2 2,4.2 3,4.2 U2.13 | length 68.9
  Top Layer w0.25: 50.213,52.464 52.438,54.688 65.688,54.688 67.913,52.464 69.213,52.464 71.438,54.688 85.688,54.688 87.913,52.464 88.213,52.464
  Bottom Layer w0.25: U2.13 61.788,73.988 62.188,73.588 62.188,71.188 60.388,69.388 60.388,65.388 62.488,63.288 62.488,59.088 69.113,52.464 69.213,52.464
S$8701: 
S$12036: 
U2_5: U2.5
U2_7: U2.7
U2_9: U2.9
U2_12: U2.12
U2_14: U2.14
U2_16: U2.16
U2_18: U2.18
U2_24: U2.24
U2_25: U2.25
U2_26: R4.2 SJ1.2 U2.26 | length 12.9
  Top Layer w0.25: v1(50.588,73.688) v1@55.389,73.688
  Bottom Layer w0.25: R4.2@45.789,73.656 50.556,73.656 v1(50.588,73.688) 50.588,73.788 SJ1.2 ; U2.26@55.389,72.639 v1(55.389,73.688)
U2_27: U2.27
U2_28: U2.28
U2_29: U2.29
U2_30: U2.30
U2_31: U2.31
U2_32: U2.32
U2_34: U2.34
U2_35: U2.35
U2_36: U2.36
U2_37: U2.37
U2_38: U2.38
U2_39: U2.39
U2_40: U2.40
U2_41: U2.41
U2_46: R7.2 U2.46 | length 8.6
  Top Layer w0.25: v1(49.688,78.688) v1(55.988,78.688)
  Bottom Layer w0.25: R7.2 48.542,78.688 v1(49.688,78.688) ; U2.46@55.789,79.614 55.789,78.888 v1(55.988,78.688)
U2_47: R6.1 U2.47 | length 8.9
  Top Layer w0.25: v1(49.688,80.888) v1(55.988,80.888)
  Bottom Layer w0.25: R6.1 48.442,80.888 v1(49.688,80.888) ; v1(55.988,80.888) 56.189,80.688 U2.47@56.189,79.738
U3_9: U3.9
U5_4: U5.4
USB1_A8: USB1.A8
USB1_B8: USB1.B8
VCC: C7.2 R2.2 U5.1 USB1.A4 USB1.A9 USB1.B4 USB1.B9 | length 21.8
  Top Layer w0.3: v1(46.689,109.688) 52.688,109.688 v1(54.688,108.688)
  Bottom Layer w0.25: USB1.A4 USB1.B9 ; USB1.B4 USB1.A9
  Bottom Layer w0.3: USB1.B9 42.539,109.488 43.689,110.188 45.589,110.188 46.839,109.688 USB1.B4 ; v1(54.688,108.688) 54.739,108.738 U5.1 57.456,108.671 R2.2
VDD: C1.2 C2.2 C3.2 C4.2 C5.2 C6.2 C8.2 C11.1 C12.1 C14.2 C15.2 C18.2 R4.1 U2.1 U2.10 U2.22 U2.33 U2.42 U2.43 U2.44 U2.48 U2.49 U3.8 U5.5 | length 121.2
  Top Layer w0.25: v1(53.389,82.088) 56.688,85.388 v1(56.688,85.688) 56.688,78.788 v1(56.789,78.688) ; v1(60.888,84.388) 62.988,82.288 v1(64.688,82.288)
  Bottom Layer w0.25: R4.1 49.156,69.488 52.288,69.488 53.388,70.588 53.83,70.588 ; U2.33@53.638,75.189 C15.2 ; U2.42@53.638,78.789 C14.2 ; U2.43 52.884,79.738 C4.2 ; U2.44 54.989,82.843 C12.1 54.443,83.143 v1(53.389,82.088) 52.034,80.734 C4.2 ; C3.2 56.589,83.043 U2.48 56.788,79.539 ; v1(56.688,85.688) 56.688,87.121 59.688,90.12 ; v1(56.789,78.688) 56.788,79.539 ; U2.49 56.988,82.088 57.688,82.688 C2.2 ; U2.22 56.989,71.843 C6.2 ; U2.49 56.788,79.539 ; C6.2 57.043,70.588 53.588,70.588 51.984,72.193 C15.2 ; U5.5 59.688,108.438 59.688,88.688 59.687,85.689 60.181,85.196 ; U3.8 60.181,85.196 ; U2.10 C1.2 ; U2.1 C5.2 C1.2 ; v1(60.888,84.388) 60.888,84.488 60.181,85.196 ; v1(64.688,82.288) 64.689,74.488 63.988,73.688 63.289,73.688 62.644,74.434 C1.2 ; C15.2 52.034,75.238 C14.2 ; C14.2 C4.2
  Bottom Layer w0.3: U5.5 61.688,110.438 61.688,111.388 60.888,112.188 C18.2
XIN: C9.2 U2.20 U4.1 | length 19.7
  Top Layer w0.25: v1(57.988,73.888) 59.788,72.088 v1(59.789,63.888)
  Bottom Layer w0.25: U2.20 57.788,73.688 v1(57.988,73.888) ; v1(59.789,63.888) 58.188,62.988 U4.1 C9.2@60.143,62.688
XOUT: R3.1 U2.21 | length 7
  Top Layer w0.25: v1(54.888,69.988) 54.888,71.588 v1(57.189,73.888)
  Bottom Layer w0.25: v1(54.888,69.988) 54.935,69.942 R3.1 ; v1(57.189,73.888) 57.389,73.688 U2.21
pads on no net: 1,1. 1,2. 1,3. 1,4. 2,1. 2,2. 2,3. 2,4. 3,2. 3,3. 3,4. SW1. USB1.

## Keep-outs
Keep-Out Layer:
  lines w0.254 net S$12036: 38.689,40.689 ccw(c40.689,40.689) 40.689,38.689 ; 38.689,111.688 cw(c40.689,111.688) 40.689,113.688 ; 92.688,38.688 ccw(c92.688,40.688) 94.688,40.688 ; 92.688,113.688 cw(c92.688,111.688) 94.688,111.688

## Text inside footprints (layer, text, board x,y; h text height)
1,1: Document "1U" at 48.476,98.491 h1.27 r180
1,2: Document "1U" at 46.901,91.886 h1.27
1,3: Document "1U" at 46.901,72.886 h1.27
1,4: Document "1U" at 46.901,53.886 h1.27
2,1: Document "1U" at 65.901,110.886 h1.27
2,2: Document "1U" at 65.901,91.886 h1.27
2,3: Document "1U" at 65.901,72.886 h1.27
2,4: Document "1U" at 65.901,53.886 h1.27
3,2: Document "1U" at 84.901,91.886 h1.27
3,3: Document "1U" at 84.901,72.886 h1.27
3,4: Document "1U" at 84.901,53.886 h1.27